# Altium PCB Project2.PcbDoc
Units mm, origin at the board's own origin, x right, y up, seen from the top; angles counter-clockwise.
Board outline 100 x 90 mm, 2 copper layers (Top Layer, Bottom Layer); 54 components, 62 nets, 236 pads, 6 vias.
Unrouted connection lines stored in the file: 4.
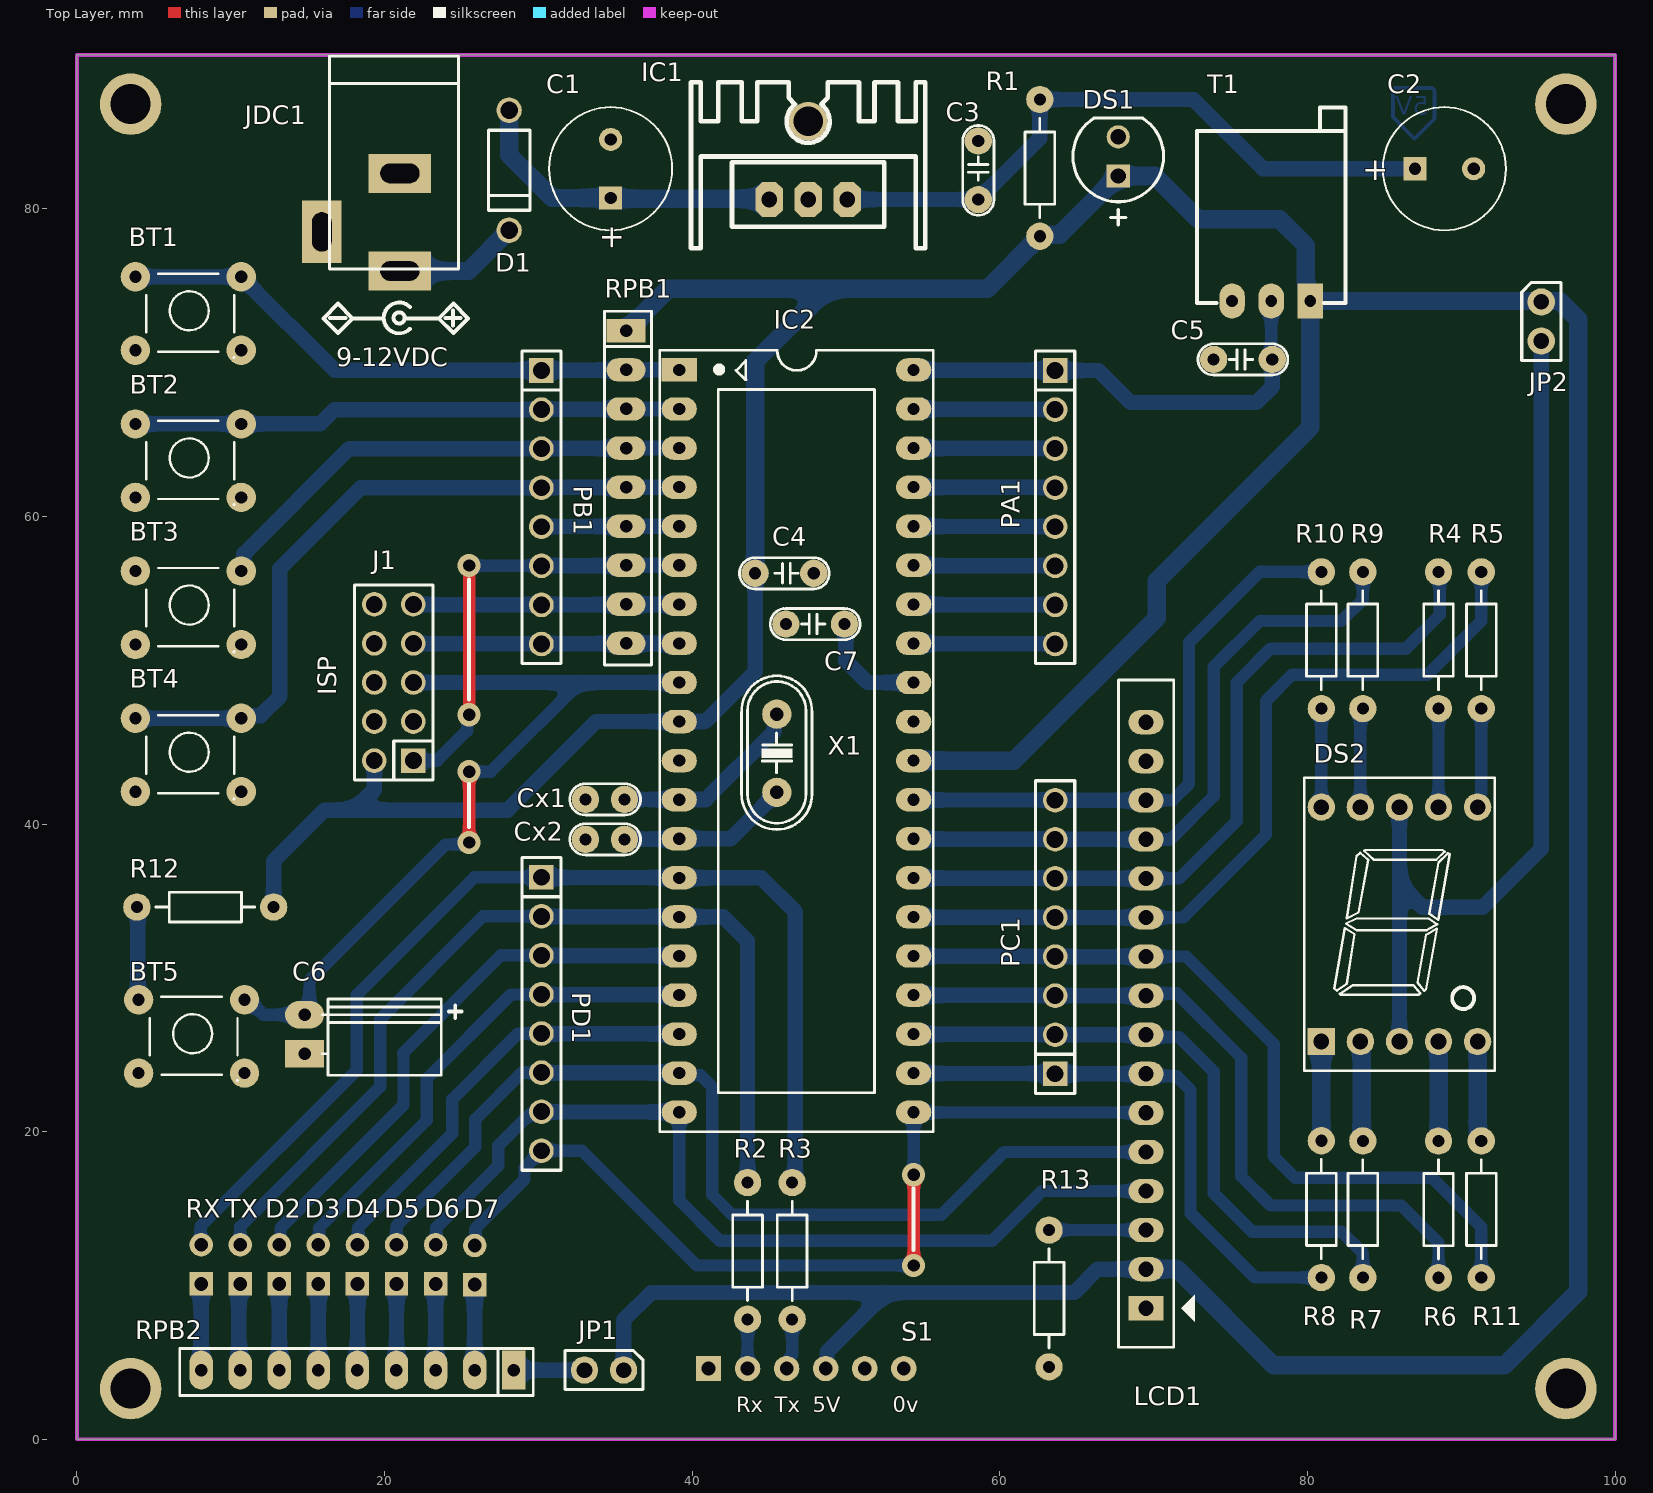
[diagram p0: Top Layer view]
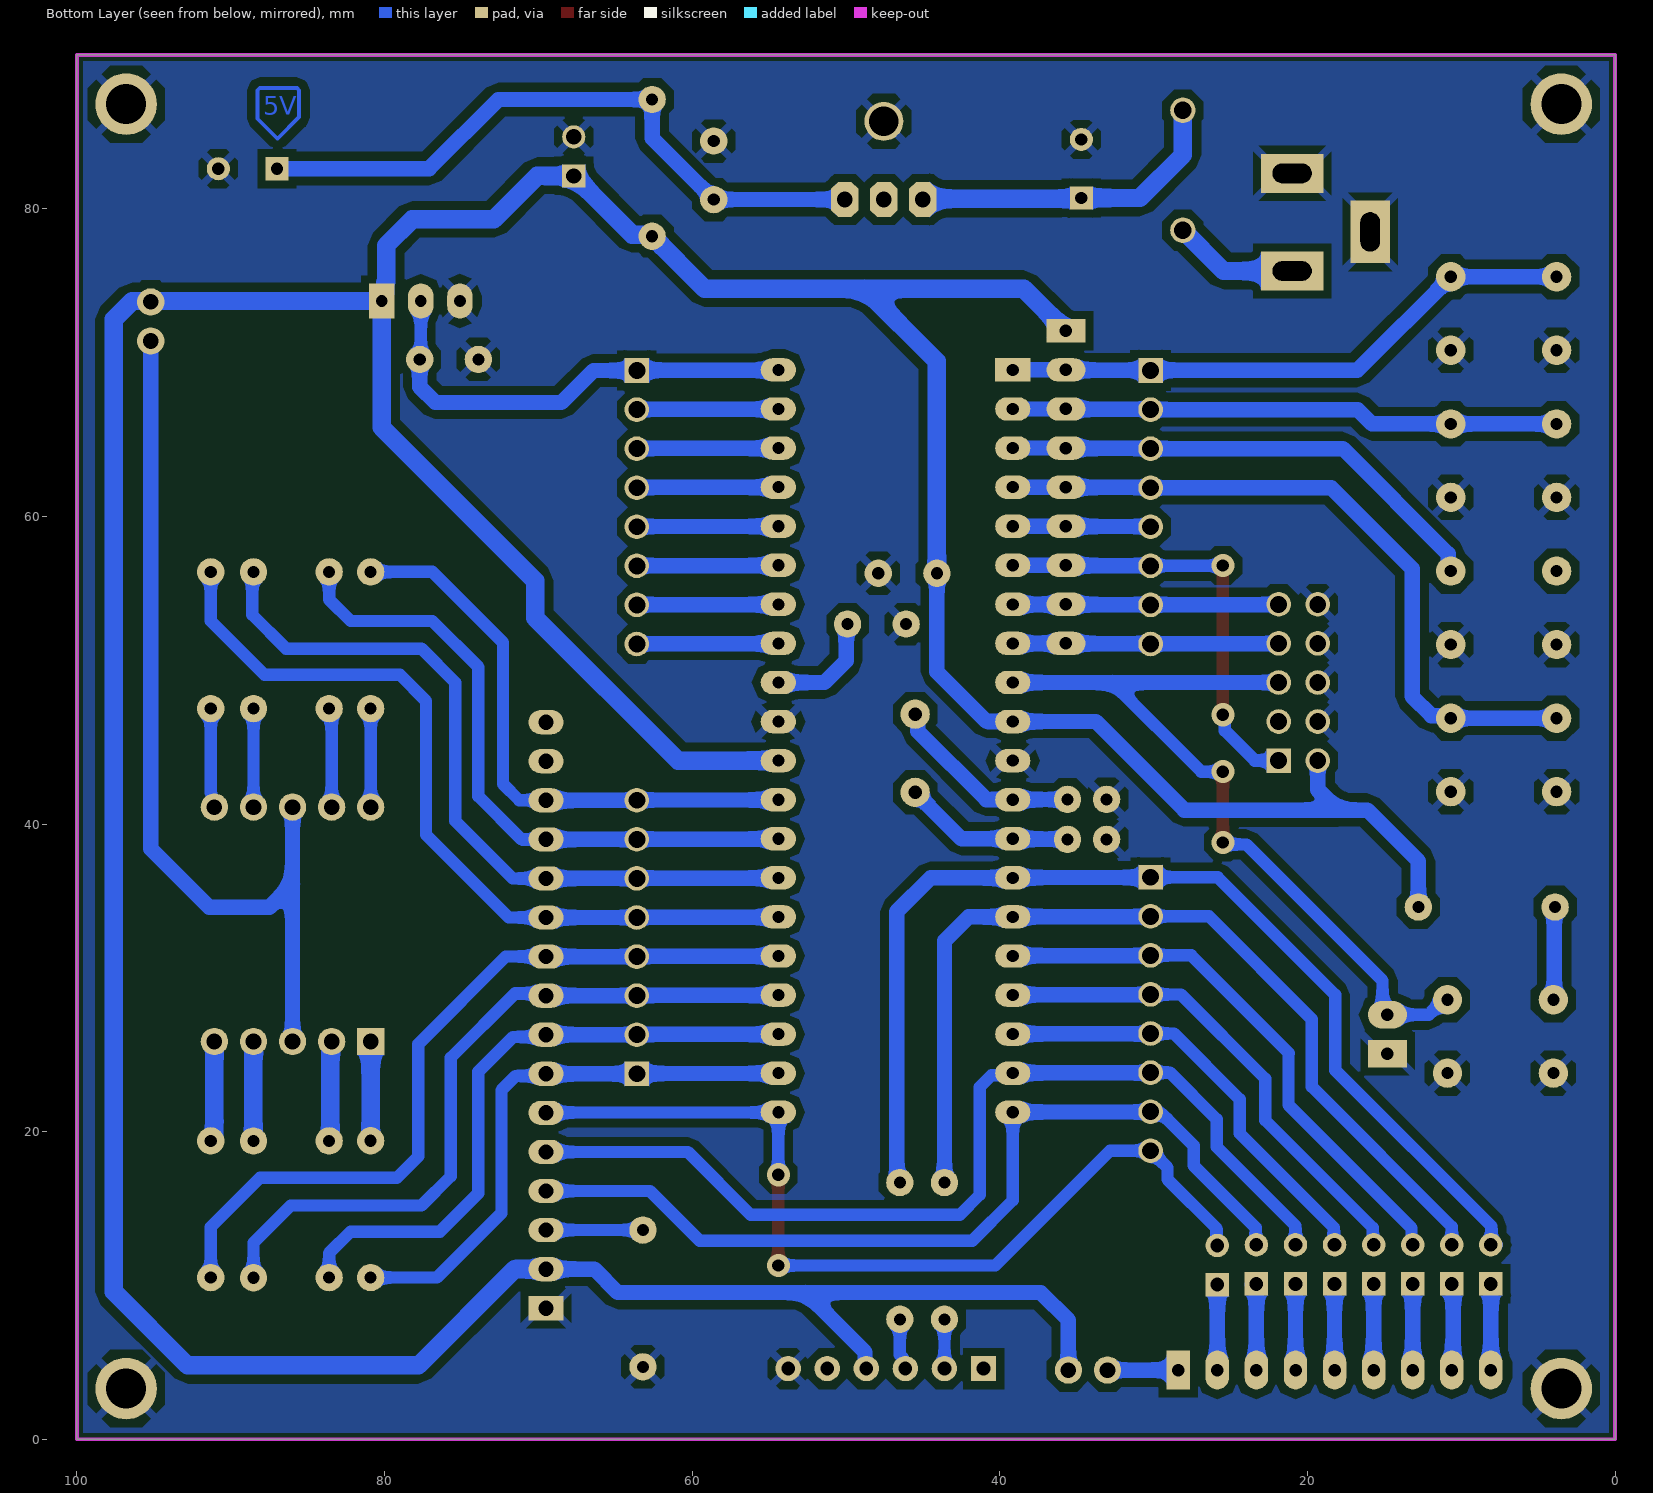
[diagram p1: Bottom Layer view, seen from below]
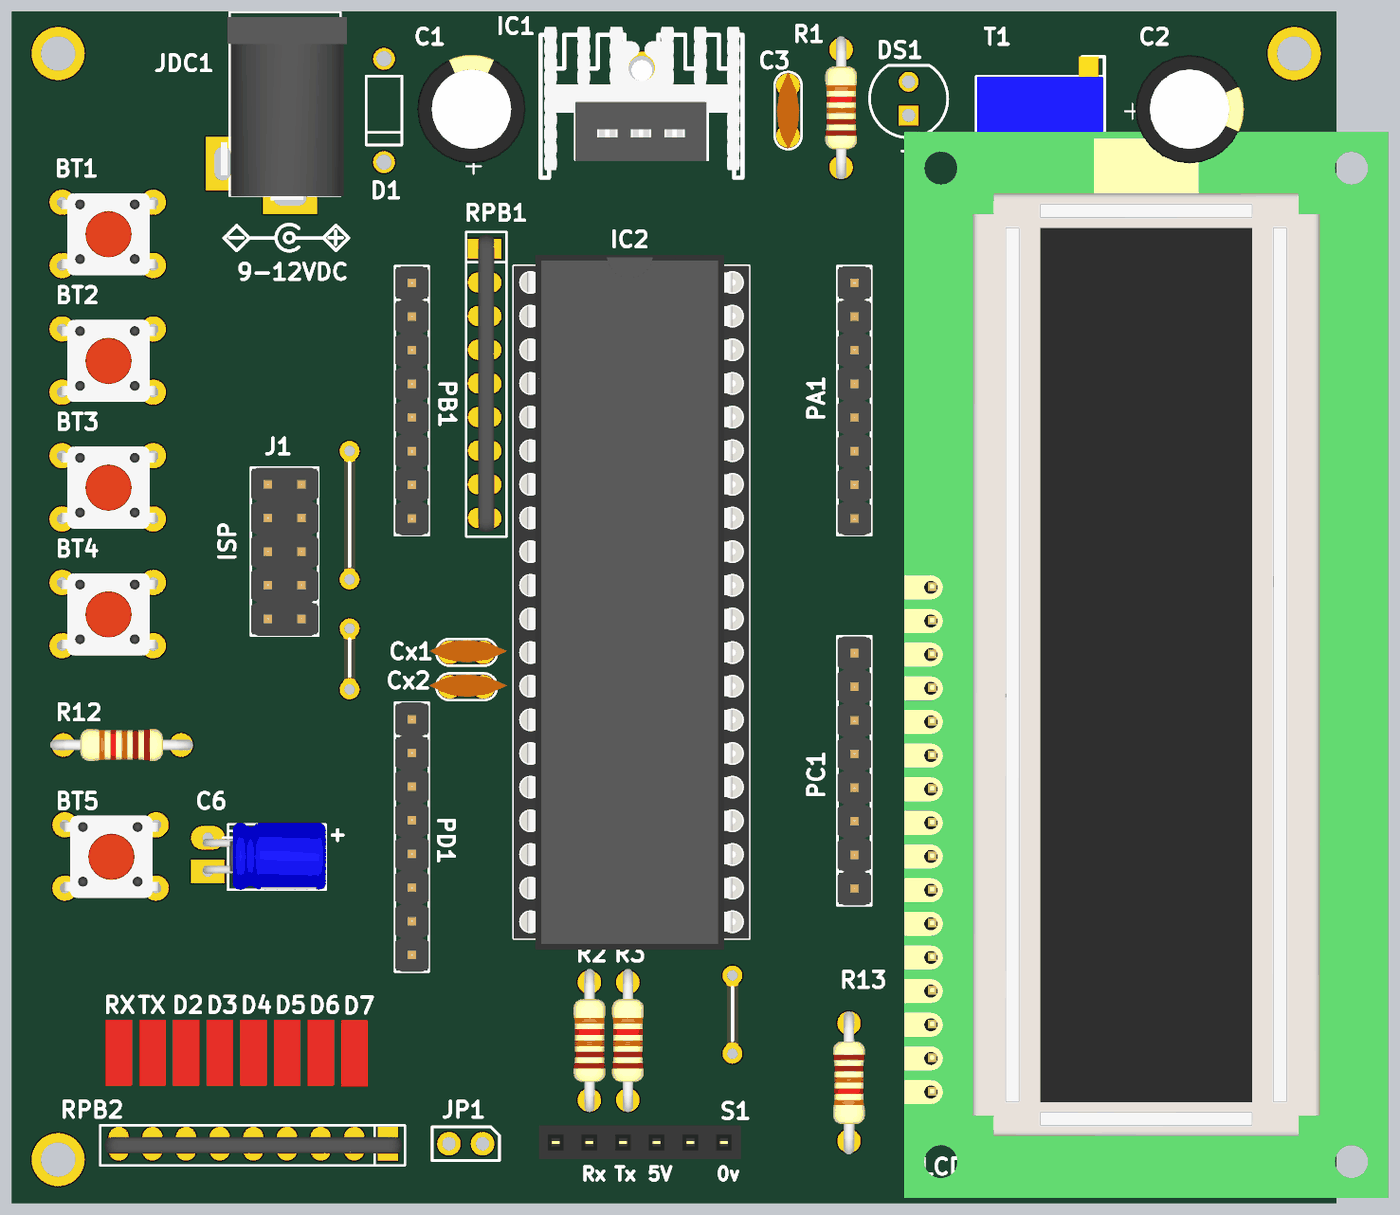
[diagram p2: 3D render of the assembled board from above, using the file's embedded part models]

## Layer stack, top to bottom
Top Solder: solder mask 0.0102, Solder Resist, Dk 3.5
Top Layer: signal copper 0.0356
Dielectric 1: dielectric 0.32, FR-4, Dk 4.8
Bottom Layer: signal copper 0.0356
Bottom Solder: solder mask 0.0102, Solder Resist, Dk 3.5

## Board outline
0,0 0,90 100,90 100,0

## Design rules (kind name [scope] priority, off if disabled: settings)
Clearance Clearance_1 [OnMid vs OnMid] p1: gap=0.508 ignorepadtopadclearanceinfootprint=FALSE
Clearance Clearance_2 [(ExistsOnLayer('Top Layer') Or ExistsOnLayer('Bottom Layer')) vs (ExistsOnLayer('Top Layer') Or ExistsOnLayer('Bottom Layer'))] p2: gap=0.508 ignorepadtopadclearanceinfootprint=FALSE
Clearance [All] p3: gap=0.254 ignorepadtopadclearanceinfootprint=FALSE except(0: Arc-Hole Track-Hole SMDPad-Hole THPad-Hole Via-Hole Fill-Hole Poly-Hole Region-Hole Text-Hole)
Clearance Clearance_3 [All] p4: gap=0.508 ignorepadtopadclearanceinfootprint=FALSE
PolygonConnect PolygonConnectStyle_1 [All] p1: connectstyle=Relief reliefconductorwidth=0.508 reliefentries=4 polygonreliefangle="45 Angle" airgapwidth=0.508
PolygonConnect [All] p2: connectstyle=Relief reliefconductorwidth=0.254 reliefentries=4 polygonreliefangle="90 Angle" airgapwidth=0.254
RoutingVias [All] p1: holewidth=0.711 width=1.27 viastyle="Through Hole" minholewidth=0.711 minwidth=1.27 maxholewidth=0.711 maxwidth=1.27
SolderMaskExpansion [All] p1: expansion=0.102 istentingtop=FALSE
Width [All] p1: maxlimit=2 minlimit=0.2 preferedwidth=1 minimp=50.000000 maximp=50.000000 favimp=50.000000
30 further rules are at their usual default settings.

## Components (designator, comment, footprint, x,y, rotation, side; value= is the part's Value field where it differs from the comment)
BT1 "BT" SW4 4.13,75.778 r0 top
BT2 "BT" SW4 4.13,66.212 r0 top
BT3 "BT" SW4 4.13,56.645 r0 top
BT4 "BT" SW4 4.13,47.078 r0 top
BT5 "BT" SW4 4.347,28.778 r0 top
C1 "CN-ALU-DIP" CA-ALU-8 34.7,82.6 r90 top value=104
C2 "CN-ALU-DIP" CA-ALU-8 88.9,82.6 r0 top value=104
C3 "CN1.5" CN1.5 58.6,84.4 r270 top value=100nF
C4 "CN1.5" CN1.5 47.9,56.3 r180 top value=100nF
C5 "CN1.5" CN1.5 73.9,70.2 r0 top value=100nF
C6 "CN-ALU-DIP" CA-ALU-5W 14.8,25.06 r90 top value=104
C7 "CN1.5" CN1.5 46.09,53 r0 top value=100nF
Cx1 "CN0" CN1 33.06,41.6 r0 top value=22pF
Cx2 "CN0" CN1 33.06,39 r0 top value=22pF
D1 "1N4007" FAIR-DO-41-2 28.1,82.5 r270 top
D2 "Led Flat" "Led Flat" 13.158,10.1 r90 top
D3 "Led Flat" "Led Flat" 15.698,10.1 r90 top
D4 "Led Flat" "Led Flat" 18.239,10.1 r90 top
D5 "Led Flat" "Led Flat" 20.779,10.1 r90 top
D6 "Led Flat" "Led Flat" 23.32,10.1 r90 top
D7 "Led Flat" "Led Flat" 25.86,10.06 r90 top
DS1 "UR502DC" CGX-UR502DC 67.7,83.4 r90 top
DS2 "7SEG" LED7SEG-1-0.56 85.853,32.845 r0 top
IC1 "LM78xx" QTO-220H3 45,80.6 r0 top value=LM358
IC2 "Atmega16L" DIP40PIN 39.16,69.52 r270 top value="Atmega 16L"
J1 "JP5x2" JP5-D2T 20.6,49.2 r90 top
JDC1 "DCIN" DC-IN 18.46,79.125 r270 top value="Jac DC"
JP1 "JP1" JP2-CLOSED 35.54,4.5 r270 top
JP2 "JP2" JP2-CLOSED 95.2,73.94 r0 top
LCD1 "LCD 16x2A" LCD16X2N 69.499,8.521 r90 top value=LCD16x2A
PA1 "JP 1x8 2.54" "JP 1x8 DT" 63.6,69.482 r270 top
PB1 "JP 1x8 2.54" "JP 1x8 DT" 30.2,69.482 r270 top
PC1 "JP 1x8 2.54" "JP 1x8 DT" 63.6,23.762 r90 top
PD1 "JP 1x8 2.54" "JP 1x8 DT" 30.2,36.54 r270 top
R1 "1k" R1/4W 62.6,87.1 r270 top value="R1/4W - 1K"
R2 "R" R1/4W 43.6,16.69 r270 top
R3 "R" R1/4W 46.5,16.69 r270 top
R4 "R" R1/4W 88.52,47.5 r90 top
R5 "R" R1/4W 91.3,47.5 r90 top
R6 "R" R1/4W 88.52,19.39 r270 top
R7 "R" R1/4W 83.6,19.4 r270 top
R8 "R" R1/4W 80.9,19.405 r270 top
R9 "R" R1/4W 83.6,47.5 r90 top
R10 "R" R1/4W 80.9,47.5 r90 top
R11 "R" R1/4W 91.3,19.4 r270 top
R12 "R" R1/4W 3.9,34.6 r0 top
R13 "R" R1/4W 63.2,4.71 r90 top
RPB1 "10K" RN8 35.7,72.06 r270 top value="Tro thanh 10K"
RPB2 "10K" RN8 28.397,4.5 r180 top value="Tro thanh 10K"
RX "Led Flat" "Led Flat" 8.077,10.1 r90 top
S1 "Socket 6P1R" "Socket 6P1R Vertical" 41.06,4.6 r0 top
T1 "10K" "BIEN TRO VI CHINH NAM" 77.64,74.127 r180 top
TX "Led Flat" "Led Flat" 10.618,10.1 r90 top
X1 "XT2" XT2 45.5,44.6 r270 top

## Footprints (in the part's own frame and the unit in brackets; to place one, negate y for a bottom-side part, rotate by r counter-clockwise, add the part's x,y. Pads: shape width x height; smd on the part's side, far side on the other; paste and mask are expansions set on the pad)
"BIEN TRO VI CHINH NAM" [mil]
  rect 65x90 hole 30: 1(-100,5)
  oval 65x90 hole 30: 2(0,5) 3(100,5)
  silkscreen extent -190,-490 190,10, body extent -187,-490 188,10, height 226
CA-ALU-5W [mil] "Tu hoa < 22uF/16>50V"
  rect 70x100 hole 32: 1(0,0)
  oval 70x100 hole 32: 2(100,0)
  silkscreen extent -55,-350 140,-45, body extent -54,-351 144,16, height 199
CA-ALU-8 [mm] "Polarized capacitors, Aluminum Electrolytic Capacitors, 2-Leads, Body 8x16x3.5x0.5"
  rect 1.5x1.5 hole 0.8: 1(-1.905,0)
  round 1.5 hole 0.8: 2(1.905,0)
  silkscreen extent -4,-4 4,4, body extent -4.1,-4.1 4.1,4.1, height 14.4
CGX-UR502DC [mm] "THD, 2-Leads, Dia 5.9mm, Pin Spacing 2.54mm"
  rect 1.5x1.5 hole 1: 1(-1.27,0)
  round 1.5 hole 1: 2(1.27,0)
  silkscreen extent -4.47,-2.95 2.5,2.95, body extent -2.95,-2.95 2.5,2.95, height 9.1
CN1 [mil]
  round 70 hole 31: 1(0,0) 2(100,0)
  silkscreen extent -40,-40 141,40, body extent -60,-30 170,37, height 265
CN1.5 [mil]
  round 70 hole 31: 1(0,0) 2(150,0)
  silkscreen extent -40,-40 190,40, body extent -40,-33 190,33, height 235
DC-IN [mil] "Jac DC input"
  rect 100x160 hole 50 slot 100 at 90 deg: 1(125,100) 2(-125,100)
  rect 160x100 hole 50 slot 100 at 0 deg: 3(25,-100)
  silkscreen extent -425,-80 120,250, body extent -410,-105 134,269, height 434
DIP40PIN [mil] "40 PIN, W 600mil, Pin to pin 100mil. With Socket"
  rect 60x90 hole 31: 1(0,0)
  oval 60x90 hole 31: 2(100,0) 3(200,0) 4(300,0) 5(400,0) 6(500,0) 7(600,0) 8(700,0) 9(800,0) 10(900,0) 11(1000,0) 12(1100,0) 13(1200,0) 14(1300,0) 15(1400,0) 16(1500,0) 17(1600,0) 18(1700,0) 19(1800,0) 20(1900,0) 21(1900,600) 22(1800,600) 23(1700,600) 24(1600,600) 25(1500,600) 26(1400,600) 27(1300,600) 28(1200,600) 29(1100,600) 30(1000,600) 31(900,600) 32(800,600) 33(700,600) 34(600,600) 35(500,600) 36(400,600) 37(300,600) 38(200,600) 39(100,600) 40(0,600)
  silkscreen extent -50,-50 1950,650, body extent -82,-50 1982,650, height 424
FAIR-DO-41-2 [mm] "THD, 2-Leads, Body 5.2x2.72mm, Pin Spacing 7.8mm"
  round 1.65 hole 1.15: 1(-3.9,0) 2(3.9,0)
  silkscreen extent -2.6,-1.35 2.6,1.35, body extent -4.29,-1.17 4.29,1.17, height 2.35
JP2-CLOSED [mil]
  round 70 hole 40: 1(0,0) 2(0,-100)
  silkscreen extent -50,-150 50,50, body extent -50,-152 50,50, height 300
JP5-D2T [mm] "10 pins, dual pin, straight, gold plating"
  rect 1.6x1.6 hole 1.1: 1(-5.08,-1.27)
  round 1.6 hole 1.1: 2(-2.54,-1.27) 3(0,-1.27) 4(2.54,-1.27) 5(5.08,-1.27) 6(5.08,1.27) 7(2.54,1.27) 8(0,1.27) 9(-2.54,1.27) 10(-5.08,1.27)
  silkscreen extent -6.35,-2.54 6.35,2.54, body extent -6.35,-2.54 6.35,2.54, height 8.55
"JP 1x8 DT" [mm] "8 pins, 1 row, straight, gold plating"
  rect 1.6x1.6 hole 1.1: 1(0,0)
  round 1.6 hole 1.1: 2(2.54,0) 3(5.08,0) 4(7.62,0) 5(10.16,0) 6(12.7,0) 7(15.24,0) 8(17.78,0)
  silkscreen extent -1.27,-1.27 19.05,1.27, body extent -1.27,-1.27 19.05,1.27, height 8.54
LCD16X2N [mil] "LCD dipslay 16x2, 16 pin"
  rect 62x90 hole 39: 1(0,0)
  oval 62x90 hole 39: 2(100,0) 3(200,0) 4(300,0) 5(400,0) 6(500,0) 7(600,0) 8(700,0) 9(800,0) 10(900,0) 11(1000,0) 12(1100,0) 13(1200,0) 14(1300,0) 15(1400,0) 16(1500,0)
  silkscreen extent -100,-125 1608,70, body extent -320,-1353 2850,84, height 764
LED7SEG-1-0.56 [mil]
  rect 70x70 hole 40: 1(-195,-275)
  round 70 hole 40: 2(-95,-275) 3(5,-275) 4(105,-275) 5(205,-275) 6(205,325) 7(105,325) 8(5,325) 9(-95,325) 10(-195,325)
  silkscreen extent -239,-350 249,400, body extent -241,-349 251,399, height 315
"Led Flat" [mil] "LedFlat 2.54mm"
  rect 60x60 hole 35: A(0,0)
  round 60 hole 35: K(100,0)
  body extent -48,-39 148,39, height 396
QTO-220H3 [mil] "TO-220 1-2-3"
  oct 70x90 hole 40: 1(0,0) 2(100,0) 3(200,0)
  round 100 hole 75: 2(100,200)
  silkscreen extent -200,-125 400,300, body extent -190,-102 392,323, height 984
R1/4W [mil] "R 1/4W, 2 Pin, 350mil"
  round 70 hole 31: 1(0,0) 2(350,0)
  silkscreen extent 48,-38 302,38, body extent -40,-47 386,47, height 111
RN8 [mil] "R SIP8, 9 Pin"
  rect 60x100 hole 32: 1(0,0)
  oval 60x100 hole 32: 2(100,0) 3(200,0) 4(300,0) 5(400,0) 6(500,0) 7(600,0) 8(700,0) 9(800,0)
  silkscreen extent -50,-55 855,65, body extent -43,-20 843,29, height 219
"Socket 6P1R Vertical" [mil] "Socket 6P1R Vertical"
  rect 65x65 hole 35: 1(0,0)
  round 65 hole 35: 2(100,0) 3(200,0) 4(300,0) 5(400,0) 6(500,0)
  body extent -50,-50 550,50, height 276
SW4 [mil] "SW button 4pin, 250 x250 mil"
  round 75 hole 31: 1(-13,-8) 1(258,-8) 2(-13,-196) 2(258,-196)
  silkscreen extent 15,-215 240,0, body extent -31,-225 281,19, height 276
XT2 [mil] "Footpin for Crystal 2 pin"
  round 75 hole 34: 1(-100,0) 2(100,0)
  silkscreen extent -198,-90 195,90, body extent -233,-93 213,90, height 138

## Part data
BT1 BT2 BT3 BT4 BT5: library part BUTTON
C1 C2 C6: "Capacitor (Semiconductor SIM Model)", LatestRevisionDate=17-Jul-2002, LatestRevisionNote="Re-released for DXP Platform.", PackageReference=C1206, Publisher="Altium Limited"
C3 C4 C5 C7: library part CMP-001-00086-1, "Cap np Cremic  682pF => 104 pF", Component Type=Standard, Design Item ID=CN1.5, Pins=2, Source=syhaunguyen.SchLib
Cx1 Cx2: library part CMP-001-00084-1, "Cap np Cremic value 1pF => 100pF", Component Type=Standard, Design Item ID=CN0, Pins=2, Source=syhaunguyen.SchLib
D1: library part CMP-004-00007-2, "General Purpose Rectifier, 1.1 V, 1.0 A, -55 to 175 degC, 2-Pin DO-41, RoHS, Tape and Reel", Case/Package=DO-41-2, Forward Current=1A, Forward Voltage=1.1V, Manufacturer=Fairchild, Max Operating Temperature=175°C, Max Surge Current=30A, Min Operating Temperature=-55°C, Package Description="2-Pin Axial Lead, Dia 2.375 mm, Body Length 4.63 mm", Package Quantity=5000, Package Version="Rev. 2, 09/2008", Peak Reverse Current=5uA, Datasheet URL=https://www.fairchildsemi.com/datasheets/1N/1N4007.pdf, Datasheet Version="Rev. 1.1.0, 11/2014", Elements=1, Manufacturer URL=https://www.fairchildsemi.com/, Mounting Technology=TH, Package Reference=DO-41-2, Package URL=http://www.fairchildsemi.com/dwg/DO/DO41A.pdf, Packaging=TapeandReel, Pins=2, RoHS Compliant=True
D2 D3 D4 D5 D6 D7 RX TX: "Led Flat 2x5mm"
DS1: library part CMP-007-00009-2, "Red LED, 80 mW, 30 mA, -25 to 85 degC, 2-Pin THD", Manufacturer="Shenzhen CGX", Package Description="2-Pin Through Hole Device, Dia 5.9 mm, Height 9.1 mm", Power=80mW, Case/Package=UR502DC, Datasheet URL=http://datasheet.octopart.com/UR502DC-Chengguangxing-datasheet-62330342.pdf, Datasheet Version=Sep-14, Manufacturer URL=http://szcgx.com/, Mounting Technology=TH, Package Reference=UR502DC, RoHS Compliant=Unknown
DS2: library part LED7SEG-1, "14.2 mm General Purpose Blue 7-Segment Display: CC, RH DP, Gray Surface", Colour=Blue, PackageDocument=24-Sep-2002, ComponentLink1Description="Manufacturer Link", ComponentLink1URL=http://www.agilent.com/, DatasheetDocument=24-Sep-2002, LatestRevisionDate=17-Dec-2003, LatestRevisionNote="Schematic revised, PCB Footprint replaced.", MinimumIntensity="2020 ucd", Note="IF = 10 mA", PackageReference=H, Published=8-Jun-2000, Publisher="Altium Limited"
IC1: library part CMP-031-00092-2, "Low-Power Dual Operational Amplifier", Component Type=Standard, Design Item ID=LM78xx, Pins=8, Source=syhaunguyen.SchLib
IC2: library part CMP-031-00059-3, "8-Bit AVR Microcontroller with 16K Bytes of In-System Programmable Flash Memory", Component Type=Standard, Design Item ID=Atmega16L, Pins=40, Source=syhaunguyen.SchLib
J1: "WR-PHD 2.54 mm Dual Socket Header", Manufacturer="W¨¹rth Elektronik eiSos GmbH", partNo=61301021821, ComponentLink1 Description=Manufacturer, ComponentLink1URL=http://www.we-online.com, ComponentLink2 Description=Datasheet, ComponentLink2URL=http://katalog.we-online.de/em/datasheet/6130xx21821.pdf, Created by="Karrer Zheng", Created Date="29 March 2013", NoPins=10
JDC1: library part CMP-007-000003-1, "Jac DC input", Component Type=Standard, Design Item ID=DCIN, Pin Count=3, Source=syhaunguyen.SchLib
JP1: library part JP2, "WR-PHD 2.54 mm Angled Socket Header", Manufacturer="W¨¹rth Elektronik eiSos GmbH", partNo=613002143121, ComponentLink1 Description=Manufacturer, ComponentLink1URL=http://www.we-online.com, ComponentLink2 Description=Datasheet, ComponentLink2URL=http://katalog.we-online.de/em/datasheet/6130xx143121.pdf, Created by="Karrer Zheng", Created Date="29 March 2013", NoPins=02
JP2: "WR-PHD 2.54 mm Angled Socket Header", Manufacturer="W¨¹rth Elektronik eiSos GmbH", partNo=613002143121, ComponentLink1 Description=Manufacturer, ComponentLink1URL=http://www.we-online.com, ComponentLink2 Description=Datasheet, ComponentLink2URL=http://katalog.we-online.de/em/datasheet/6130xx143121.pdf, Created by="Karrer Zheng", Created Date="29 March 2013", NoPins=02
LCD1: library part LCD16x2A, "LCD dipslay 16 char, 2 line"
PA1 PB1 PC1 PD1: library part "JP 1x8 2.54 Duc Thang", "Cắm", Chung_Loai=Cắm, Don_Vi=Con, Ma_Hang=MH000903, Ten_Linh_Kien="Jump Đơn Đực 2.54MM 1x40P Thẳng 11MM"
R1: library part R, "Resistor 1/4W"
R2 R3 R4 R5 R6 R7 R8 R9 R10 R11 R12 R13: library part CMP-009-00186-1, "Resistor 1/4W", Design Item ID=R, Height=0, Pad Count=3, Source=heromap.SchLib
RPB1 RPB2: library part RN8, "Resistor 8 (Thanh)"
S1: "Socket 6Pins x 1Rows"
T1: library part "Bien Tro Tinh Chinh 10K Nam", "Cắm", Chung_Loai=Cắm, Don_Vi=Con, Ma_Hang=MH003232, Ten_Linh_Kien="Biến Trở VR 103-10K 3296W"
X1: library part CMP-040-000117-1, "18 PIN, W 300mil, Pin to pin 100mil", Design Item ID=XT2, Height=100, Pad Count=18, Source=heromap.SchLib

## Free pads (board coordinates)
  round 4 hole 2.6: ""(3.5,3.3) ""(3.5,86.8) ""(96.8,3.3) ""(96.8,86.8)

## Via types
v1: diameter 1.5/1.5 (per signal layer), hole 0.8, Top Layer to Bottom Layer, 6 vias

## Nets (pads, with @x,y where several pads share a name; then routed paths per layer and width w, separated by ;. In a path a pad name is that pad's centre, name@x,y a point inside that pad or via, vN(x,y) a via of type N, cw(c..) or ccw(c..) an arc to the next point about the centre after c; other vN are vias at no path point)
AVR_RX: IC2.14 PD1.1 R3.1 RX.K | length 70.8
  Bottom Layer w0.8: RX.K@7.7,12.64 7.939,12.879 7.95,12.879 8.046,12.974 8.046,13.846 18.2,24 18.2,28.9 25.84,36.54 PD1.1
  Bottom Layer w1: PD1.1 30.22,36.52 39.14,36.52 IC2.14 44.5,36.5 46.7,34.3 R3.1@46.7,16.69
AVR_TX: IC2.15 PD1.2 R2.1 TX.K | length 61.5
  Bottom Layer w0.8: TX.K 10.618,13.818 19.714,22.914 19.714,27.3 ; 19.7,27.3 26.4,34 PD1.2
  Bottom Layer w1: PD1.2 30.22,33.98 39.14,33.98 IC2.15 42.04,33.96 43.6,32.4 R2.1
FT_RX: R2.2 S1.2 | length 3.2
  Bottom Layer w0.8: S1.2 R2.2
FT_TX: R3.2 S1.3 | length 3.3
  Bottom Layer w0.8: S1.3 46.303,4.763 46.303,5.297 46.5,5.494 R3.2
GND: BT1.2 BT2.2 BT3.2 BT4.2 BT5.2 C1.2 C2.2 C3.1 C4.1 C5.1 C6.1 C7.1 Cx1.1 Cx2.1 DS1.2 IC1.2 IC2.11 IC2.31 J1.6 J1.7 J1.8 J1.9 JDC1.2 JDC1.3 LCD1.1 pad. R13.1 S1.6 T1.3 | length 0
  Bottom Layer w0.254: C1.2 C1.2@34.705,84.505
MISO: IC2.7 J1.5 PB1.7 RPB1.8 | length 17.3
  Bottom Layer w1: J1.5 21.889,54.261 30.181,54.261 PB1.7 30.219,54.261 35.681,54.261 RPB1.8 IC2.7
MOSI: IC2.6 J1.1 PB1.6 RPB1.7 | length 28.8
  Top Layer w0.8: v1(25.5,47.1) v1(25.5,56.8)
  Bottom Layer w0.8: J1.1 23.42,44.12 25.371,46.071 25.371,46.971 v1(25.5,47.1) ; v1(25.5,56.8) 25.509,56.791 30.191,56.791 PB1.6
  Bottom Layer w1: PB1.6 30.219,56.801 35.681,56.801 RPB1.7 IC2.6
NetC1_1: C1.1 D1.1 IC1.1 | length 21
  Bottom Layer w1.2: D1.1 28.1,83.5 30.905,80.695 C1.1 34.747,80.647 44.952,80.647 IC1.1
NetC2_1: C2.1 C3.2 IC1.3 R1.1 | length 42.9
  Bottom Layer w1: IC1.3@50.085,80.595 C3.2@58.595,80.595 ; C3.2 62.6,84.59 R1.1 72.6,87.1 77.1,82.6 C2.1
  Bottom Layer w1.2: IC1.3 IC1.3@50.085,80.595 ; C3.2@58.595,80.595 C3.2
NetC7_2: C7.2 IC2.32 | length 7.4
  Bottom Layer w1: C7.2 49.989,52.911 49.989,50.611 51.4,49.2 IC2.32
NetCx1_2: Cx1.2 IC2.12 X1.1 | length 12.8
  Bottom Layer w1: Cx1.2 35.61,41.59 39.15,41.59 IC2.12 40.88,41.58 45.327,46.027 45.327,46.967 X1.1
NetCx2_2: Cx2.2 IC2.13 X1.2 | length 11.2
  Bottom Layer w1: Cx2.2 35.62,39.02 39.14,39.02 IC2.13 42.48,39.04 X1.2
NetD1_2: D1.2 JDC1.1 | length 8.2
  Bottom Layer w1.2: JDC1.1 25.45,75.95 D1.2
NetD2_A: D2.A RPB2.7 | length 5.6
  Bottom Layer w1: D2.A 13.159,10.099 13.159,4.501 RPB2.7@13.16,4.5
NetD3_A: D3.A RPB2.6 | length 5.6
  Bottom Layer w1: RPB2.6 D3.A
NetD4_A: D4.A RPB2.5 | length 5.5
  Bottom Layer w1: RPB2.5@18.24,4.5 D4.A@18.24,10.04
NetD5_A: D5.A RPB2.4 | length 5.6
  Bottom Layer w1: RPB2.4@20.779,4.502 D5.A
NetD6_A: D6.A RPB2.3 | length 5.7
  Bottom Layer w1: RPB2.3@23.32,4.5 23.32,9.838 23.542,10.06 D6.A@23.6,10.06
NetD7_A: D7.A RPB2.2 | length 5.6
  Bottom Layer w1: RPB2.2@25.86,4.503 D7.A
NetDS2_1: DS2.1 R8.1 | length 6.5
  Bottom Layer w1.2: R8.1 DS2.1
NetDS2_2: DS2.2 R7.1 | length 6.5
  Bottom Layer w1.2: DS2.2 83.52,25.78 83.52,19.48 R7.1
NetDS2_3: DS2.3 DS2.8 JP2.2 | length 59.8
  Bottom Layer w1: DS2.3 85.98,36.1 ; DS2.8 85.98,36.1 ; JP2.2@95.2,71.52 95.2,38.4 91.4,34.6 87.48,34.6 85.98,36.1
NetDS2_4: DS2.4 R6.1 | length 6.5
  Bottom Layer w1.2: R6.1 DS2.4
NetDS2_5: DS2.5 R11.1 | length 6.6
  Bottom Layer w1.2: DS2.5 91.06,19.796 91.3,19.556 R11.1
NetDS2_6: DS2.6 R5.1 | length 6.5
  Bottom Layer w0.8: DS2.6 91.247,41.287 91.247,41.979 91.3,42.032 R5.1
NetDS2_7: DS2.7 R4.1 | length 6.4
  Bottom Layer w0.8: DS2.7 R4.1
NetDS2_9: DS2.9 R9.1 | length 6.5
  Bottom Layer w0.8: DS2.9 83.44,47.34 R9.1
NetDS2_10: DS2.10 R10.1 | length 6.4
  Bottom Layer w0.8: DS2.10 R10.1
NetJP1_2: JP1.2 RPB2.1 | length 4.6
  Bottom Layer w1: RPB2.1@28.4,4.5 JP1.2
NetLCD1_3: LCD1.3 R13.2 | length 6.3
  Bottom Layer w0.8: R13.2@63.201,13.601 LCD1.3
NetRPB2_8: RPB2.8 TX.A | length 5.7
  Bottom Layer w1: TX.A@10.429,10.1 10.524,10.004 10.524,4.596 RPB2.8@10.62,4.5
NetRPB2_9: RPB2.9 RX.A | length 5.6
  Bottom Layer w1: RPB2.9@8.077,4.503 RX.A
PA0: C5.2 IC2.40 PA1.1 T1.2 | length 30.2
  Bottom Layer w0.8: T1.2 77.64,70.27 C5.2
  Bottom Layer w1: IC2.40 54.419,69.501 63.581,69.501 PA1.1 66.418,69.482 68.5,67.4 76.7,67.4 77.71,68.41 C5.2
PA1: IC2.39 PA1.2 | length 9.2
  Bottom Layer w1: IC2.39 54.419,66.961 63.581,66.961 PA1.2
PA2: IC2.38 PA1.3 | length 9.2
  Bottom Layer w1: IC2.38 54.419,64.421 63.581,64.421 PA1.3
PA3: IC2.37 PA1.4 | length 9.2
  Bottom Layer w1: IC2.37 54.419,61.881 63.581,61.881 PA1.4
PA4: IC2.36 PA1.5 | length 9.2
  Bottom Layer w1: IC2.36 54.419,59.341 63.581,59.341 PA1.5
PA5: IC2.35 PA1.6 | length 9.2
  Bottom Layer w1: IC2.35 54.419,56.801 63.581,56.801 PA1.6
PA6: IC2.34 PA1.7 | length 9.2
  Bottom Layer w1: IC2.34 54.419,54.261 63.581,54.261 PA1.7
PA7: IC2.33 PA1.8 | length 9.2
  Bottom Layer w1: IC2.33 54.419,51.721 63.581,51.721 PA1.8
PB0: BT1.1 IC2.1 PB1.1 RPB1.2 | length 37.9
  Bottom Layer w1: BT1.1@3.8,75.575 10.683,75.575 16.759,69.5 30.182,69.5 PB1.1 30.219,69.501 35.681,69.501 RPB1.2 IC2.1
PB1: BT2.1 IC2.2 PB1.2 RPB1.3 | length 35.8
  Bottom Layer w1: BT2.1@3.8,66.009 10.683,66.009 15.809,66.009 16.742,66.942 PB1.2 30.219,66.961 35.681,66.961 RPB1.3 IC2.2
PB2: BT3.1 IC2.3 PB1.3 RPB1.4 | length 32.3
  Bottom Layer w1: BT3.1@10.683,56.442 10.857,56.615 10.857,57.557 17.7,64.4 30.198,64.4 PB1.3 30.219,64.421 35.681,64.421 RPB1.4 IC2.3
PB3: BT4.1 IC2.4 PB1.4 RPB1.5 | length 46.4
  Bottom Layer w1: BT4.1@3.8,46.875 10.683,46.875 10.857,47.048 11.948,47.048 13.2,48.3 13.2,56.6 18.462,61.862 PB1.4 30.219,61.881 35.681,61.881 RPB1.5 IC2.4
PB4: IC2.5 PB1.5 RPB1.6 | length 9
  Bottom Layer w1: PB1.5 30.219,59.341 35.681,59.341 RPB1.6 IC2.5
PC0: IC2.22 LCD1.7 PC1.1 R8.2 | length 36.7
  Bottom Layer w0.8: LCD1.7 69.647,23.613 71.487,23.613 72.4,22.7 72.4,14.7 76.585,10.515 R8.2
  Bottom Layer w1: IC2.22 54.419,23.781 63.581,23.781 PC1.1 LCD1.7
PC1: IC2.23 LCD1.8 PC1.2 R7.2 | length 41.3
  Bottom Layer w0.8: LCD1.8 69.647,26.153 71.647,26.153 73.9,23.9 73.9,16 76.4,13.5 82.2,13.5 83.6,12.1 R7.2
  Bottom Layer w1: IC2.23 54.419,26.321 63.581,26.321 PC1.2 LCD1.8
PC2: IC2.24 LCD1.9 PC1.3 R6.2 | length 47.7
  Bottom Layer w0.8: LCD1.9 69.647,28.989 71.511,28.989 75.7,24.8 75.7,17.1 77.6,15.2 86.1,15.2 88.52,12.78 R6.2
  Bottom Layer w1: IC2.24 54.419,28.861 63.581,28.861 PC1.3 LCD1.9
PC3: IC2.25 LCD1.10 PC1.4 R11.2 | length 51.8
  Bottom Layer w0.8: LCD1.10 72.119,31.381 77.8,25.7 77.8,18.4 79.2,17 88.1,17 91.3,13.8 R11.2
  Bottom Layer w1: IC2.25 54.419,31.401 63.581,31.401 PC1.4 LCD1.10
PC4: IC2.26 LCD1.11 PC1.5 R5.2 | length 53.2
  Bottom Layer w0.8: LCD1.11@69.5,33.92 71.92,33.92 77.3,39.3 77.3,48 79,49.7 87.8,49.7 91.3,53.2 R5.2
  Bottom Layer w1: IC2.26 54.419,33.941 63.581,33.941 PC1.5 63.601,33.921 LCD1.11 ; LCD1.11 LCD1.11@69.5,33.92
PC5: IC2.27 LCD1.12 PC1.6 R4.2 | length 49.4
  Bottom Layer w0.8: LCD1.12@69.5,36.46 71.66,36.46 75.4,40.2 75.4,49.2 77.6,51.4 86.4,51.4 88.6,53.6 R4.2@88.6,56.39
  Bottom Layer w1: IC2.27 54.419,36.481 63.581,36.481 PC1.6 63.601,36.461 LCD1.12 ; LCD1.12 LCD1.12@69.5,36.46
PC6: IC2.28 LCD1.13 PC1.7 R9.2 | length 42.4
  Bottom Layer w0.8: LCD1.13@69.5,39 71.1,39 73.9,41.8 73.9,50.2 76.9,53.2 82.2,53.2 83.6,54.6 R9.2
  Bottom Layer w1: IC2.28 54.419,39.021 63.581,39.021 PC1.7 63.601,39.001 LCD1.13 ; LCD1.13 LCD1.13@69.5,39
PC7: IC2.29 LCD1.14 PC1.8 R10.2 | length 38.1
  Bottom Layer w0.8: LCD1.14@69.5,41.54 71.24,41.54 72.3,42.6 72.3,51.8 76.89,56.39 R10.2
  Bottom Layer w1: IC2.29 54.419,41.561 63.581,41.561 PC1.8 63.601,41.541 LCD1.14 ; LCD1.14 LCD1.14@69.5,41.54
PD2: D2.K IC2.16 PD1.3 | length 36.4
  Bottom Layer w0.8: D2.K 13.236,12.718 13.236,13.736 21.229,21.729 21.229,25.1 ; 21.2,25.1 27.56,31.46 PD1.3
  Bottom Layer w1: PD1.3 30.22,31.44 39.14,31.44 IC2.16
PD3: D3.K IC2.17 PD1.4 | length 32.4
  Bottom Layer w0.8: D3.K 15.757,12.698 15.757,13.757 22.743,20.743 22.743,23.443 28.22,28.92 PD1.4
  Bottom Layer w1: PD1.4 30.22,28.9 39.14,28.9 IC2.17
PD4: D4.K IC2.18 PD1.5 | length 28.6
  Bottom Layer w0.8: D4.K 18.288,12.689 18.288,13.766 24.4,19.878 24.4,22.1 28.68,26.38 PD1.5
  Bottom Layer w1: PD1.5 30.22,26.36 39.14,26.36 IC2.18
PD5: D5.K IC2.19 LCD1.5 PD1.6 | length 64.8
  Bottom Layer w0.8: D5.K 20.779,13.879 25.9,19 25.9,20.8 28.94,23.84 PD1.6 ; IC2.19 39.299,23.661 40.539,23.661 41.3,22.9 41.3,15.9 42.6,14.6 56.2,14.6 60.281,18.681 LCD1.5
  Bottom Layer w1: PD1.6 30.22,23.82 39.14,23.82 IC2.19
PD6: D6.K IC2.20 LCD1.4 PD1.7 | length 59.3
  Bottom Layer w0.8: D6.K 23.367,12.688 23.367,13.767 27.4,17.8 27.4,19.1 29.447,21.147 30.047,21.147 PD1.7 ; IC2.20 39.16,15.54 41.8,12.9 59.5,12.9 62.741,16.141 LCD1.4
  Bottom Layer w1: PD1.7 30.22,21.28 39.14,21.28 IC2.20
PD7: D7.K IC2.21 LCD1.6 PD1.8 | length 60.3
  Top Layer w0.8: v1(54.4,11.3) v1(54.4,17.2)
  Bottom Layer w0.8: D7.K 25.917,12.657 25.917,13.717 29.1,16.9 29.1,17.66 PD1.8 32.84,18.76 40.3,11.3 v1(54.4,11.3) ; v1(54.4,17.2) IC2.21 54.42,21.241 69.48,21.241 LCD1.6
RESET: BT5.1 C6.2 IC2.9 J1.3 R12.1 | length 58.3
  Top Layer w0.8: v1(25.5,38.8) v1(25.5,43.4)
  Bottom Layer w0.8: BT5.1@10.9,28.575 11.145,28.575 12.12,27.6 C6.2 15.118,27.918 15.118,29.818 23.966,38.666 25.366,38.666 v1(25.5,38.8) ; v1(25.5,43.4) 26.9,43.4 32.7,49.2
  Bottom Layer w1: R12.1 3.958,34.542 3.958,28.634 BT5.1@4.017,28.575 ; J1.3 32.7,49.2 IC2.9
SCK: IC2.8 J1.4 PB1.8 RPB1.9 | length 17.3
  Bottom Layer w1: J1.4 21.889,51.721 30.181,51.721 PB1.8 30.219,51.721 35.681,51.721 RPB1.9 IC2.8
VCC: C4.2 DS1.1 IC2.10 IC2.30 J1.10 JP1.1 JP2.1 LCD1.2 R1.2 R12.2 RPB1.1 S1.4 T1.1 | length 327.3
  Bottom Layer w1: R12.2 12.79,37.58 16.11,40.9 18,40.9 ; J1.10 19.33,42.23 18,40.9 ; JP1.1 35.54,7.74 37.343,9.543 52.643,9.543 ; C4.2 44.09,49.89 40.86,46.66 IC2.10 33.76,46.66 28,40.9 18,40.9 ; S1.4 48.766,4.686 48.766,5.666 52.643,9.543 ; LCD1.2 66.361,11.061 64.843,9.543 52.643,9.543
  Bottom Layer w1.2: RPB1.1 38.44,74.8 48.815,74.8 ; C4.2 44.09,70.075 48.815,74.8 ; IC2.30 60.92,44.12 70.2,53.4 70.2,55.8 80.18,65.78 T1.1 ; LCD1.2 71.539,11.061 77.8,4.8 92.8,4.8 97.6,9.6 97.6,72.8 96.4,74 JP2.1@95.2,74 ; JP2.1@95.14,74 T1.1 ; 48.815,74.8 59.19,74.8 R1.2 62.711,78.321 63.891,78.321 DS1.1 70.07,82.13 72.9,79.3 78.2,79.3 79.9,77.6 79.9,75.246 79.955,75.191 79.955,74.543 80.18,74.317 T1.1
pads on no net: J1.2 LCD1.15 LCD1.16 S1.1 S1.5
copper on no net: | length 10.2
  Bottom Layer w0.254: 85.55,85.95 85.55,87.701 85.699,87.85 88.101,87.85 88.25,87.701 88.25,85.85 86.95,84.55 85.55,85.95

## Polygon pours and split planes (outlines as drawn)
GND on Bottom Layer "GND" (solid, remove dead copper, pour order 2): 0,0 0,90 100,90 100,0 99.8,90.1 99.8,0.3

## Keep-outs
Keep-Out Layer:
  the board outline again, w0.254

## Other copper
Bottom Layer:
  text "5V" at 87.896,86.096 h1.2

## Silkscreen, mask and mechanical layers (free items; w line width, h text height)
Top Overlay:
  circle w0.254: c20.95,72.9 r0.361
  lines w0.254: 16.45,72.9 17.45,72.9 ; 19.925,72.875 17.925,72.875 ; 21.336,72.875 23.525,72.875 ; 21.657,72.193 cw(c20.95,72.9) 21.657,73.607 ; 23.95,72.9 24.95,72.9 ; 24.2,27.8 25,27.8 ; 24.45,72.4 24.45,73.4 ; 24.6,27.4 24.6,28.2 ; 25.5,39.8 25.5,42.6 ; 25.5,48.1 25.5,55.9 ; 54.4,12.3 54.4,16.3 ; 17.925,72.875 16.975,73.825 16.025,72.875 16.975,71.925 17.925,72.875 ; 23.525,72.875 24.475,71.925 25.425,72.875 24.475,73.825 23.525,72.875
  text "9-12VDC" at 16.854,69.754 h1.2
  text "ISP" at 16.846,48.354 h1.2 r90
  text "Rx" at 42.854,1.754 h1
  text "Tx" at 45.354,1.754 h1
  text "5V" at 47.854,1.754 h1
  text "0v" at 53.054,1.754 h1

## Text inside footprints (layer, text, board x,y; h text height)
C1: Top Overlay "+" at 35.437,77.275 h1.5 r90
C2: Top Overlay "+" at 83.575,81.863 h1.5